# Altium PCB Switch Matrix PCB.PcbDoc (part 2 of 3)
Units mil, origin at the board's own origin, x right, y up, seen from the top; angles counter-clockwise.
Board outline 3937.01 x 7874.02 mil, 2 copper layers (Top Layer, Bottom Layer), stack 62.8 mil thick; 178 components, 222 nets, 852 pads, 317 vias.
Unrouted connection lines stored in the file: 1.
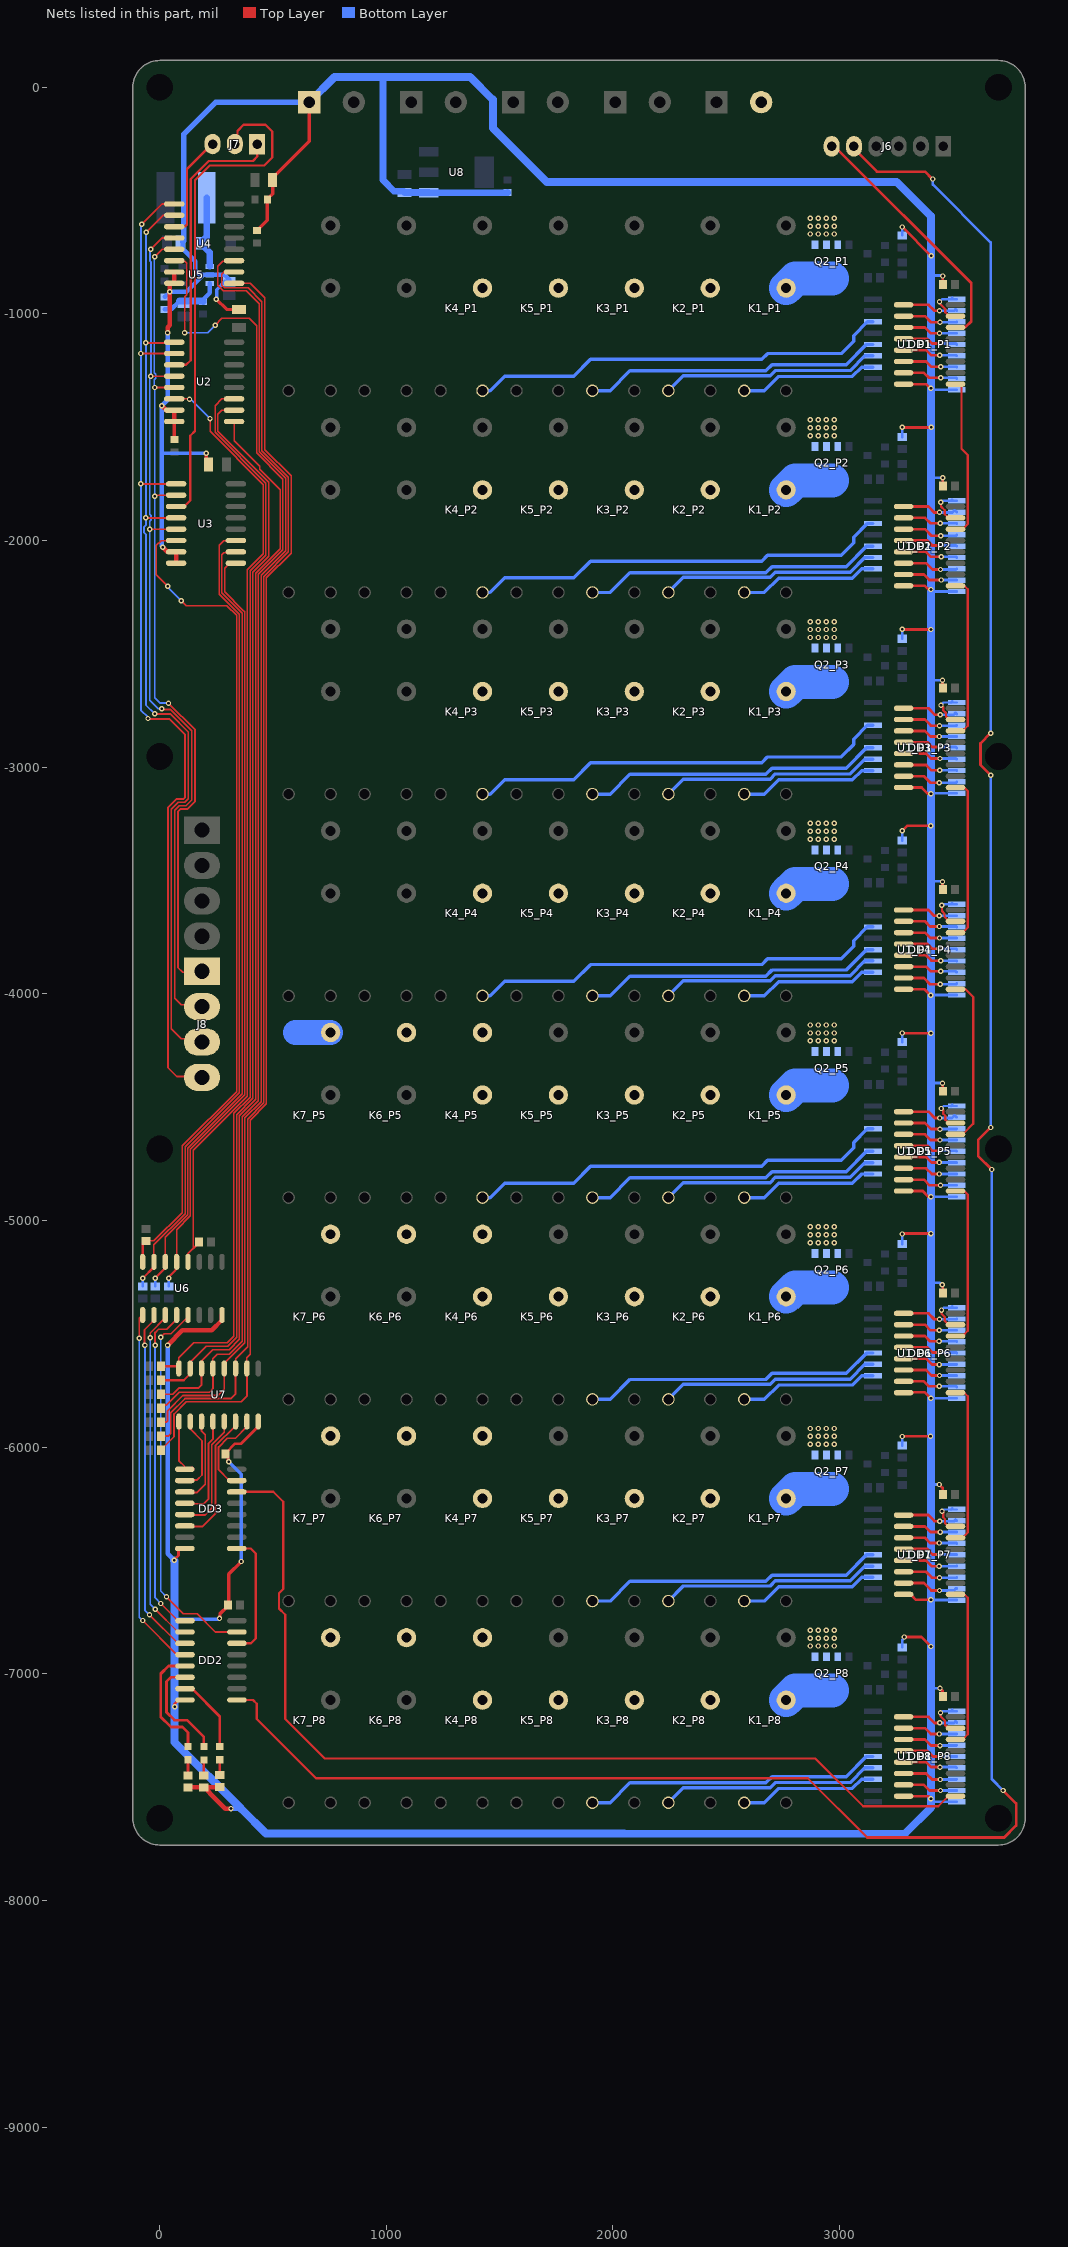
[diagram p2: the nets of this part, all layers, seen from the top]

## Via types
v1: diameter 23.62, hole 11.81, Top Layer to Bottom Layer, 315 vias
v2: diameter 31.5, hole 15.75, Top Layer to Bottom Layer, 2 vias

## Nets (pads, with @x,y where several pads share a name; then routed paths per layer and width w, separated by ;. In a path a pad name is that pad's centre, name@x,y a point inside that pad or via, vN(x,y) a via of type N, cw(c..) or ccw(c..) an arc to the next point about the centre after c; other vN are vias at no path point) (continued)
DC_PIN5: J8.1 K4_P5.3 K6_P5.3 K7_P5.3 U2.5 U3.2 U4.5 | length 3855.6
  Top Layer w8: v1(-21.81,-1805.08) -16.81,-1800.08 U3.2@72.6,-1800.08 ; v1(-21.81,-1325.08) 46.38,-1325.08 U2.5@64.49,-1325.08 ; v1(-21.12,-747.58) 11.38,-715.08 U4.5@64.49,-715.08 ; v1(38.88,-2717.58) 156.38,-2835.08 156.38,-3150.08 121.38,-3185.08 91.38,-3185.08 80.38,-3196.08 80.38,-3884.08 101.38,-3905.08 J8.1@181.38,-3905.08
  Bottom Layer w8: v1(-21.12,-747.58) -23.62,-750.08 -23.62,-1259.23 -16.81,-1266.04 -16.81,-1284.11 -23.62,-1290.92 -23.62,-1325.08 v1(-21.81,-1325.08) -21.81,-1803.27 -23.62,-1805.08 v1(-21.81,-1805.08) -21.81,-1809.31 -21.62,-1809.5 -21.62,-2693.08 2.88,-2717.58 v1(38.88,-2717.58)
  Bottom Layer w100: J8.1@186.89,-3900.91 ccw(c203.52,-3884.27) J8.1@203.52,-3907.8
  Bottom Layer w110: 600.32,-4170.91 K7_P5.3@754.41,-4170.91
DC_PIN6: J8.2 K4_P6.3 K6_P6.3 K7_P6.3 U2.4 U3.5 U4.4 | length 3948
  Top Layer w8: v1(-43.62,-1950.08) U3.5@72.6,-1950.08 ; v1(-38.62,-1275.08) U2.4@64.49,-1275.08 ; v1(-38.62,-715.08) 11.38,-665.08 U4.4@64.49,-665.08 ; v1@8.88,-2745.08 46.38,-2745.08 141.38,-2840.08 141.38,-3145.08 116.38,-3170.08 86.38,-3170.08 66.38,-3190.08 66.38,-4020.08 94.89,-4048.59 174.89,-4048.59 J8.2@186.38,-4060.08
  Bottom Layer w8: v1(-38.62,-715.08) -42.93,-719.39 -42.93,-765.77 -38.62,-770.08 v1(-38.62,-1275.08) -43.62,-1280.08 -43.62,-1884.23 -38.62,-1889.23 -38.62,-1910.92 -43.62,-1915.92 -43.62,-2669.23 -43.62,-2705.08 -6.12,-2742.58 v1(8.88,-2742.58)
DC_PIN7: J8.3 K4_P7.3 K6_P7.3 K7_P7.3 U2.1 U3.4 U4.2 | length 4263.5
  Top Layer w8: v1(-60.81,-1900.08) 71.38,-1900.08 U3.4@72.6,-1900.08 ; v1(-60.62,-1128.08) 57.49,-1128.08 59.49,-1130.08 U2.1@64.49,-1125.08 ; v1(-58.62,-640.08) 16.38,-565.08 U4.2@64.49,-565.08 ; v1(-21.12,-2765.08) 46.38,-2765.08 126.38,-2845.08 126.38,-3140.08 111.38,-3155.08 81.38,-3155.08 51.38,-3185.08 51.38,-4155.08 94.89,-4198.59 169.89,-4198.59 J8.3@186.38,-4215.08
  Bottom Layer w8: v1(-58.62,-640.08) -60.43,-641.89 -60.43,-1931.89 -68.62,-1940.08 -68.62,-1965.08 -60.43,-1973.27 -60.43,-2725.77 v1(-21.12,-2765.08)
DC_PIN8: J8.4 K4_P8.3 K6_P8.3 K7_P8.3 U2.2 U3.1 U4.1 | length 4565.8
  Top Layer w8: v1(-83.62,-1750.08) U3.1@72.6,-1750.08 ; v1(-83.62,-1175.08) 66.38,-1175.08 U2.2@64.49,-1175.08 ; v1(-78.62,-605.08) 11.38,-515.08 66.38,-515.08 U4.1@64.49,-515.08 ; v1(-51.12,-2785.08) -49.31,-2786.89 43.19,-2786.89 111.38,-2855.08 111.38,-3135.08 106.38,-3140.08 76.38,-3140.08 36.38,-3180.08 36.38,-4325.08 76.38,-4365.08 181.38,-4365.08 J8.4@186.38,-4370.08
  Bottom Layer w8: v1(-78.62,-605.08) -82.62,-609.08 -82.62,-1750.08 -82.62,-2748.58 -51.12,-2780.08 v1(-51.12,-2785.08)
DIN: DD1_P1.14 J6.6 | length 1114.6
  Top Layer w12: J6.6@2965.04,-260.91 2976.91,-260.91 3580.79,-864.79 3580.79,-1032.8 3555.73,-1057.86 3513.6,-1057.86 DD1_P1.14@3511.38,-1060.08
DOUT: DD2.9 J6.5 | length 11664.5
  Top Layer w10: DD2.9@340.87,-7115.91 412.21,-7115.91 428.88,-7132.58 428.88,-7200.21 689.75,-7461.08 2859.75,-7461.08 3121.56,-7722.89 ; J6.5@3063.46,-270.91 J6.5@3063.46,-260.91 ; v1@3408.88,-405.08 v1(3411.38,-405.08) ; 3553.57,-7722.89 3553.88,-7722.58
  Top Layer w12: J6.5@3063.46,-270.91 3165.14,-372.58 3376.38,-372.58 v1@3408.88,-405.08 ; 3121.56,-7722.89 3553.57,-7722.89 ; 3553.88,-7722.58 3726.38,-7722.58 3778.88,-7670.08 3778.88,-7572.58 v1(3721.38,-7515.08) ; v1(3666.38,-4590.08) 3611.38,-4645.08 3611.38,-4715.08 v1(3671.38,-4775.08) ; v1(3666.38,-3035.08) 3621.38,-2990.08 3621.38,-2895.08 v1(3666.38,-2850.08)
  Bottom Layer w10: v1(3666.38,-2850.08) 3666.38,-2827.58
  Bottom Layer w12: v1(3411.38,-405.08) 3411.38,-429.38 3666.38,-684.38 3666.38,-2827.58 ; v1(3666.38,-4590.08) v1(3666.38,-3035.08) ; v1(3671.38,-4775.08) 3671.38,-7465.08 v1(3721.38,-7515.08)
GND: C1_P1.1 C1_P2.1 C1_P3.1 C1_P4.1 C1_P5.1 C1_P6.1 C1_P7.1 C1_P8.1 C2.1 C3.1 C5.1 C6.1 C7.1 C8.1 C9.2 C10.1 C11.2 C12.1 C13.2 C14.1 DD1_P1.8 DD1_P2.8 DD1_P3.8 DD1_P4.8 DD1_P5.8 DD1_P6.8 DD1_P7.8 DD1_P8.8 DD2.8 DD3.8 J1.1 J5.2 Q2_P1.1 Q2_P1.2 Q2_P1.3 Q2_P2.1 Q2_P2.2 Q2_P2.3 Q2_P3.1 Q2_P3.2 Q2_P3.3 Q2_P4.1 Q2_P4.2 Q2_P4.3 Q2_P5.1 Q2_P5.2 Q2_P5.3 Q2_P6.1 Q2_P6.2 Q2_P6.3 Q2_P7.1 Q2_P7.2 Q2_P7.3 Q2_P8.1 Q2_P8.2 Q2_P8.3 R3_P1.1 R3_P2.1 R3_P3.1 R3_P4.1 R3_P5.1 R3_P6.1 R3_P7.1 R3_P8.1 R6.1 R7.1 R8.1 R9.1 U1_P1.9 U1_P2.9 U1_P3.9 U1_P4.9 U1_P5.9 U1_P6.9 U1_P7.9 U1_P8.9 U2.7 U2.8 U3.7 U3.8 U4.7 U4.8 U5.2 U6.8 U7.8 U8.1 | length 26922.6
  Top Layer w12: v1(64,-6500) 64,-6496.86 83.25,-6477.61 83.25,-6453.16 88.62,-6447.8 DD3.8@110.79,-6447.8 ; v1(66,-7146) 66,-7133.44 83.54,-7115.91 DD2.8@111.89,-7115.91 ; v1(264,-6756) v1@266.22,-6753.78 ; v1@301.52,-6058.38 305,-6061.86 v1(305,-6065) ; C3.1@301.52,-6041.8 C3.1@289.8,-6030.08 289.8,-6028.11 332.91,-5985 360,-5985 435,-5910 U7.8@435,-5887 ; C2.1@302.3,-6699.55 C2.1@302.3,-6697.58 C2.1@305,-6694.88 ; v1(3276,-1500) 3277,-1501 v1(3405,-1501) ; v1(3276,-617) 3277,-617 v1(3404,-744) ; v1(3277,-5953) 3278,-5952 v1(3401,-5952) ; v1(3277,-5060) 3279,-5058 v1(3403,-5058) ; v1(3277,-4173) 3278,-4174 v1(3403,-4174) ; v1(3277,-3280) 3299,-3258 v1(3402,-3258) ; v1(3277,-2392) 3278,-2393 v1(3403,-2393) ; DD1_P8.8@3282.4,-7540.08 3392.08,-7540.08 v1(3403,-7551) ; DD1_P7.8@3282.4,-6650.08 3313.9,-6650.08 3337.82,-6674 v1(3403,-6674) ; DD1_P6.8@3282.4,-5760.08 3284.19,-5758.29 3376.29,-5758.29 v1(3403,-5785) ; DD1_P5.8@3282.4,-4870.08 3367.08,-4870.08 3391,-4894 3401,-4894 v1(3403,-4896) ; DD1_P4.8@3282.4,-3980.08 3375.08,-3980.08 v1(3402,-4007) ; DD1_P3.8@3282.4,-3090.08 3282.48,-3090 3362,-3090 3388,-3116 3402,-3116 v1(3403,-3117) ; DD1_P2.8@3282.4,-2200.08 3376.08,-2200.08 3390,-2214 3401,-2214 v1(3403,-2216) ; DD1_P1.8@3282.4,-1310.08 3381.94,-1310.08 3399.86,-1328 v1(3403,-1328) ; v1(3286,-6838) 3361,-6838 v1(3403,-6880) ; v1(3440,-6165) 3440,-6166 3455,-6181 3455,-6209.76 C1_P7.1@3455.32,-6210.08 ; v1(3443,-7064) 3443,-7065 3455.32,-7077.32 C1_P8.1@3455.32,-7100.08 ; v1(3453,-5284) 3455.32,-5286.32 C1_P6.1@3455.32,-5320.08 ; v1(3454,-4394) 3454,-4396 3455.32,-4397.32 C1_P5.1@3455.32,-4430.08 ; v1(3454,-3505) 3454,-3538.76 C1_P4.1@3455.32,-3540.08 ; v1(3454,-2617) 3454,-2648.76 C1_P3.1@3455.32,-2650.08 ; v1(3455,-1723) 3455,-1728 3455.32,-1728.32 C1_P2.1@3455.32,-1760.08 ; v1(3455,-833) 3455,-864 3460,-869 3458.92,-870.08 C1_P1.1@3455.32,-870.08
  Top Layer w15: U2.8@64.49,-1475.08 65,-1475.59 C11.2@65,-1555 ; v1(205,-1615) 205,-1653.74 C14.1@216.26,-1665 ; v1(250,-935) 295.63,-980.63 C12.1@350,-980.63 ; v1@266.22,-6753.78 266.22,-6735.63 C2.1@302.3,-6699.55 ; v1@301.52,-6058.38 C3.1@301.52,-6041.8 ; C2.1@305,-6694.88 305,-6560 v1(360,-6505) ; C13.2@430,-632.44 431.97,-632.44 440.22,-624.19 440.22,-622.22 475.11,-587.33 C9.2@475.11,-495 475.11,-493.03 498.74,-469.4 C10.1@498.74,-410 498.74,-399.17 660.04,-237.87 J5.2@660.04,-65.91
  Top Layer w20: v1(9,-1405) 9.97,-1405 30.05,-1425.08 U2.7@64.49,-1425.08 U2.8@64.49,-1475.08 ; v1(14,-2030) 34.08,-2050.08 U3.7@72.6,-2050.08 U3.8@72.6,-2100.08 ; v1(35,-5550) 100,-5485 229.6,-5485 275,-5439.6 U6.8@275,-5417 ; v1(35,-1083.54) 35,-1059 44.41,-1049.59 v1(44.41,-902.8) 44.41,-866.75 46.09,-865.08 U4.8@64.49,-865.08 U4.7@64.49,-815.08 ; R9.1@125,-7501.57 R8.1@195,-7501.57 ; R7.1@265,-7500 264.21,-7500.79 195.79,-7500.79 R8.1@195,-7501.57 ; v1(315,-7595) 289.1,-7595 221.34,-7527.24 221.34,-7524.96 197.95,-7501.57 R8.1@195,-7501.57
  Bottom Layer w12: v1@260,-6760 v1(264,-6756) ; v1(3276,-1500) 3276.89,-1500.89 R3_P2.1@3276.89,-1543.5 ; v1(3276,-617) 3276.89,-617.89 R3_P1.1@3276.89,-653.5 ; R3_P8.1@3276.89,-6883.5 3276.89,-6850.25 3286,-6841.14 v1(3286,-6838) ; R3_P7.1@3276.89,-5993.5 3276.89,-5953.11 v1(3277,-5953) ; R3_P6.1@3276.89,-5103.5 3276.89,-5060.11 v1(3277,-5060) ; R3_P5.1@3276.89,-4213.5 3276.89,-4173.11 v1(3277,-4173) ; R3_P4.1@3276.89,-3323.5 3276.89,-3280.11 v1(3277,-3280) ; R3_P3.1@3276.89,-2433.5 3276.89,-2396.11 3277,-2396 v1(3277,-2392) ; v1(3402,-4007) 3403,-4007 3404.92,-4005.08 U1_P4.9@3516.93,-4005.08 ; v1(3403,-7551) 3406.14,-7551 3420.22,-7565.08 U1_P8.9@3516.93,-7565.08 ; 3403,-7064 v1(3443,-7064) ; v1(3403,-6674) 3404.08,-6675.08 U1_P7.9@3516.93,-6675.08 ; 3403,-6165 v1(3440,-6165) ; v1(3403,-5785) 3403.08,-5785.08 U1_P6.9@3516.93,-5785.08 ; 3403,-5275 3440.86,-5275 3449.86,-5284 v1(3453,-5284) ; v1(3403,-4896) 3403.92,-4895.08 U1_P5.9@3516.93,-4895.08 ; 3403,-4391 3406,-4394 v1(3454,-4394) ; 3403,-3503 3452,-3503 v1(3454,-3505) ; v1(3403,-3117) 3405,-3115 3513,-3115 3513.08,-3115.08 U1_P3.9@3516.93,-3115.08 ; 3403,-2613 3407,-2617 v1(3454,-2617) ; v1(3403,-2216) 3412.08,-2225.08 U1_P2.9@3516.93,-2225.08 ; 3403,-1723 v1(3455,-1723) ; v1(3403,-1328) 3410.08,-1335.08 U1_P1.9@3516.93,-1335.08 ; 3403,-831 3453,-831 v1(3455,-833)
  Bottom Layer w15: 9,-1610 14,-1615 v1(205,-1615) ; 66,-6760 v1@260,-6760 ; v1(250,-935) 251.65,-933.35 251.65,-893.35 290,-855 300.39,-855 C6.1@306.97,-848.43 ; v1(305,-6065) 360,-6120 v1(360,-6505)
  Bottom Layer w20: v1(14,-2030) 9,-2025 9,-1610 v1(9,-1405) 35,-1379 v1(35,-1083.54) ; R6.1@21.97,-925.24 23.93,-925.24 43.72,-905.46 43.72,-903.49 v1(44.41,-902.8) 118.45,-902.8 186.1,-835.14 186.1,-827.8 ; v1(35,-5550) 35,-6471 v1(64,-6500) ; C5.1@101.34,-682.8 101.34,-712.17 156.97,-767.8 156.97,-807.8 176.97,-827.8 186.1,-827.8 ; C6.1@306.97,-848.43 286.34,-827.8 186.1,-827.8 ; v1(315,-7595) 359,-7595 362,-7598
  Bottom Layer w25: C5.1@101.34,-682.8 107,-677.13 107,-207 248.09,-65.91 J5.2@660.04,-65.91
  Bottom Layer w30: 985,45 985,-410 1034.06,-459.06 1075.31,-459.06 C7.1@1080,-463.74 1080.91,-464.65 1187.09,-464.65 U8.1@1188,-465.55 1188.19,-465.74 1534.26,-465.74 C8.1@1535,-465
  Bottom Layer w35: v1(64,-6500) 66,-6502 66,-6760 v1(66,-7146) 66,-7302 359,-7595 ; 362,-7598 469.5,-7705.5 2048,-7705.5 2048.5,-7706 3288,-7706 3403,-7591 v1(3403,-7551) 3403,-7064 v1(3403,-6880) v1(3403,-6674) 3403,-6165 v1(3403,-5785) 3403,-5275 v1(3403,-5058) v1(3403,-4896) 3403,-4391 v1(3403,-4174) 3403,-4007 3403,-3503 v1(3403,-3117) 3403,-2613 v1(3403,-2393) v1(3403,-2216) 3403,-1723 v1(3403,-1328) 3403,-831 3403,-569 3252,-418 1708,-418 1470,-180 1470,-55 1370,45 985,45 770.95,45 J5.2@660.04,-65.91
  other v1: 2870.79,-6877.8 2905.79,-6877.8 2940.79,-6877.8 2975.79,-6877.8 2870.79,-6842.8 2905.79,-6842.8 2940.79,-6842.8 2975.79,-6842.8 2870.79,-6807.8 2905.79,-6807.8 2940.79,-6807.8 2975.79,-6807.8 2870.79,-5987.8 2905.79,-5987.8 2940.79,-5987.8 2975.79,-5987.8 2870.79,-5952.8 2905.79,-5952.8 2940.79,-5952.8 2975.79,-5952.8 2870.79,-5917.8 2905.79,-5917.8 2940.79,-5917.8 2975.79,-5917.8 2870.79,-5097.8 2905.79,-5097.8 2940.79,-5097.8 2975.79,-5097.8 2870.79,-5062.8 2905.79,-5062.8 2940.79,-5062.8 2975.79,-5062.8 2870.79,-5027.8 2905.79,-5027.8 2940.79,-5027.8 2975.79,-5027.8 2870.79,-4207.8 2905.79,-4207.8 2940.79,-4207.8 2975.79,-4207.8 2870.79,-4172.8 2905.79,-4172.8 2940.79,-4172.8 2975.79,-4172.8 2870.79,-4137.8 2905.79,-4137.8 2940.79,-4137.8 2975.79,-4137.8 2870.79,-3317.8 2905.79,-3317.8 2940.79,-3317.8 2975.79,-3317.8 2870.79,-3282.8 2905.79,-3282.8 2940.79,-3282.8 2975.79,-3282.8 2870.79,-3247.8 2905.79,-3247.8 2940.79,-3247.8 2975.79,-3247.8 2870.79,-2427.8 2905.79,-2427.8 2940.79,-2427.8 2975.79,-2427.8 2870.79,-2392.8 2905.79,-2392.8 2940.79,-2392.8 2975.79,-2392.8 2870.79,-2357.8 2905.79,-2357.8 2940.79,-2357.8 2975.79,-2357.8 2870.79,-1537.8 2905.79,-1537.8 2940.79,-1537.8 2975.79,-1537.8 2870.79,-1502.8 2905.79,-1502.8 2940.79,-1502.8 2975.79,-1502.8 2870.79,-1467.8 2905.79,-1467.8 2940.79,-1467.8 2975.79,-1467.8 2870.79,-647.8 2905.79,-647.8 2940.79,-647.8 2975.79,-647.8 2870.79,-612.8 2905.79,-612.8 2940.79,-612.8 2975.79,-612.8 2870.79,-577.8 2905.79,-577.8 2940.79,-577.8 2975.79,-577.8
MUXA1: R15.1 U2.11 U7.16 | length 4765.6
  Top Layer w6: U7.16@85,-5653 85,-5605 150,-5540 298,-5540 328,-5510 328,-4527.63 399.38,-4456.26 399.38,-2134.26 469.19,-2064.44 469.19,-1748.26 244.38,-1523.45 244.38,-1405.08 274.38,-1375.08 U2.11@328.27,-1375.08
  Top Layer w10: R15.1@6.57,-5643.33 75.33,-5643.33 U7.16@85,-5653
MUXA2: R11.1 U3.11 U6.15 | length 3566.9
  Top Layer w6: U6.15@-25,-5183 -25,-5106.97 112,-4969.97 112,-4675.75 351.38,-4436.37 351.38,-2325.11 262.38,-2236.11 262.38,-2021.08 283.38,-2000.08 U3.11@336.38,-2000.08
  Top Layer w10: v1(-75,-5255) -25,-5205 U6.15@-25,-5183
  Bottom Layer w10: R11.1@-75,-5291.85 v1(-75,-5255)
MUXA3: R19.1 U4.11 U7.12 | length 5698.6
  Top Layer w6: U7.12@285,-5653 285,-5630 376,-5539 376,-5525 376,-4547.52 447.38,-4476.14 447.38,-2154.14 555.98,-2045.54 555.98,-1725.28 439.38,-1608.68 439.38,-954.38 382.89,-897.89 281.21,-897.89 256.38,-873.06 256.38,-789.08 278.38,-767.08 326.27,-767.08 U4.11@328.27,-765.08
  Top Layer w8: R19.1@6.57,-5890 30,-5890 35.19,-5884.81 35.19,-5839.81 103,-5772 258.24,-5772 285,-5745.24 U7.12@285,-5653
MUXB1: R16.1 U2.10 U7.15 | length 4745.8
  Top Layer w6: U7.15@135,-5664.79 U7.15@135,-5653 135,-5625 205,-5555 300,-5555 340,-5515 340,-4532.6 411.38,-4461.23 411.38,-2139.23 481.19,-2069.42 481.19,-1743.29 256.38,-1518.48 256.38,-1442.08 273.38,-1425.08 U2.10@328.27,-1425.08
  Top Layer w10: R16.1@6.57,-5705 106.58,-5705 135,-5676.58 U7.15@135,-5664.79
MUXB2: R12.1 U3.10 U6.14 | length 3492.4
  Top Layer w6: U6.14@25,-5196.5 U6.14@25,-5183 25,-5073.94 124,-4974.94 124,-4680.72 363.38,-4441.34 363.38,-2320.14 355.38,-2312.14 355.38,-2312.08 274.38,-2231.08 274.38,-2062.08 283.01,-2053.45 333.01,-2053.45 U3.10@336.38,-2050.08
  Top Layer w10: v1(-20,-5255) 25,-5210 U6.14@25,-5196.5
  Bottom Layer w10: R12.1@-20,-5291.85 v1(-20,-5255)
MUXB3: R20.1 U4.10 U7.11 | length 5736.7
  Top Layer w6: U4.10@328.27,-815.08 284.92,-815.08 273.99,-826.01 273.99,-873.7 286.18,-885.89 390.89,-885.89 451.38,-946.38 451.38,-1603.71 567.98,-1720.31 567.98,-2050.51 459.38,-2159.11 459.38,-4481.11 388,-4552.49 388,-5557 335,-5610 U7.11@335,-5653
  Top Layer w8: R20.1@6.57,-5951.67 37.52,-5951.67 49.19,-5940 49.19,-5848.58 111.77,-5786 314,-5786 335,-5765 U7.11@335,-5653
MUXC1: R17.1 U2.9 U7.14 | length 4715.9
  Top Layer w6: U7.14@185,-5653 185,-5620 235,-5570 307,-5570 352,-5525 352,-4537.58 423.38,-4466.2 423.38,-2144.2 531.98,-2035.59 531.98,-1777.11 440.57,-1685.7 440.57,-1673.27 328.27,-1560.97 U2.9@328.27,-1475.08
  Top Layer w8: R17.1@6.57,-5766.67 58.53,-5766.67 85.2,-5740 170,-5740 185,-5725 U7.14@185,-5653
MUXC2: R13.1 U3.9 U6.13 | length 3405.1
  Top Layer w6: U6.13@75,-5183 75,-5040.91 136,-4979.91 136,-4685.69 375.38,-4446.31 375.38,-2315.17 367.38,-2307.17 367.38,-2307.08 286.38,-2226.08 286.38,-2121.38 307.68,-2100.08 U3.9@336.38,-2100.08
  Top Layer w10: v1(40,-5255) 40,-5250 70,-5220 70,-5215.27 75,-5210.27 U6.13@75,-5183
  Bottom Layer w10: R13.1@40,-5291.85 v1(40,-5255)
MUXC3: R21.1 U4.9 U7.10 | length 5677.6
  Top Layer w6: U4.9@328.27,-865.08 400.08,-865.08 464.38,-929.38 464.38,-1599.74 579.98,-1715.34 579.98,-2055.48 471.38,-2164.08 471.38,-4486.08 400,-4557.46 400,-5590 385,-5605 U7.10@385,-5653
  Top Layer w8: R21.1@6.57,-6013.33 12.48,-6013.33 12.48,-6004.47 63.19,-5953.77 63.19,-5854.38 117.57,-5800 360,-5800 385,-5775 U7.10@385,-5653
MUXEN1: R14.1 U2.6 U6.12 | length 4188.6
  Top Layer w6: U2.6@64.49,-1375.08 129.38,-1375.08 v1(131.38,-1377.08) ; 125,-5146.38 148,-5123.38 148,-4690.66 387.38,-4451.28 387.38,-2129.28 457.19,-2059.47 457.19,-1753.23 222.38,-1518.42 v1(222.38,-1462.08)
  Top Layer w10: U6.12@125,-5183 125,-5146.38 ; 148,-5123.38 173.43,-5097.95 R14.1@173.43,-5095
  Bottom Layer w6: v1(131.38,-1377.08) 137.38,-1377.08 v1(222.38,-1462.08)
MUXEN2: R10.1 U3.6 U6.16 | length 3703.1
  Top Layer w6: R10.1@-62.28,-5090 R10.1@-60,-5090 -25,-5090 100,-4965 100,-4670.78 339.38,-4431.4 339.38,-2330.08 296.38,-2287.08 116.38,-2287.08 v1(95,-2265.7) ; v1(36.38,-2202.08) -14.62,-2151.08 -14.62,-2021.62 6.92,-2000.08 U3.6@72.6,-2000.08
  Top Layer w10: U6.16@-75,-5183 -75,-5102.72 R10.1@-62.28,-5090
  Bottom Layer w6: v1(36.38,-2202.08) 36.38,-2207.08 v1(95,-2265.7)
MUXEN3: R18.1 U4.6 U7.13 | length 5889.1
  Top Layer w6: U4.6@64.49,-765.08 67.86,-768.45 110.75,-768.45 119.38,-777.08 119.38,-915.19 110,-924.57 v1(110,-1083.54) ; U7.13@235,-5653 235,-5610 255,-5590 308.03,-5590 364,-5534.03 364,-4542.55 435.38,-4471.17 435.38,-2149.17 543.98,-2040.56 543.98,-1730.25 427.38,-1613.65 427.38,-1052.38 395,-1020 275,-1020 v1(245,-1050)
  Top Layer w8: R18.1@6.57,-5828.33 19.91,-5815 30,-5815 87,-5758 220,-5758 235,-5743 U7.13@235,-5653
  Bottom Layer w6: v1(110,-1083.54) 211.46,-1083.54 v1(245,-1050)
MUXOUT1: J7.1 U2.3 | length 1270.3
  Top Layer w10: U2.3@64.49,-1225.08 116.38,-1225.08 136.76,-1204.69 136.76,-404.69 216.38,-325.08 411.38,-325.08 430.32,-306.14 J7.1@430.32,-250.91
MUXOUT2: J7.2 U3.3 | length 2231.9
  Top Layer w10: U3.3@72.6,-1850.08 108.8,-1850.08 135,-1823.87 135,-1537.99 156.38,-1516.61 156.38,-410.08 221.38,-345.08 461.38,-345.08 496.38,-310.08 496.38,-195.08 466.38,-165.08 371.38,-165.08 343.37,-193.09 343.37,-239.43 J7.2@331.89,-250.91
MUXOUT3: J7.3 U4.3 | length 463.3
  Top Layer w10: U4.3@64.49,-615.08 111.38,-615.08 120.76,-605.69 120.76,-360.69 230.55,-250.91 J7.3@233.46,-250.91
NetC4_1: C4.1 R4.1 R6.2 U5.3 | length 278.1
  Bottom Layer w20: R6.2@21.97,-980.36 50.64,-980.36 C4.1@87.57,-943.43 ; R4.1@191.97,-945.24 191.97,-936.85 221.02,-907.8 U5.3@221.02,-865.2
  Bottom Layer w30: C4.1@87.57,-943.43 190.15,-943.43 R4.1@191.97,-945.24
NetD1_2: D1.2 L1.2 U5.1 | length 331
  Bottom Layer w30: L1.2@207.52,-487.8 207.52,-660.31 D1.2@180.04,-687.8 221.02,-728.78 U5.1@221.02,-790.39
NetD2_1: D2.1 DD2.7 | length 336.4
  Top Layer w12: DD2.7@111.89,-7065.91 143.39,-7065.91 265,-7187.52 D2.1@265,-7320.47
NetD2_2: D2.2 R7.2 | length 67.3
  Top Layer w12: R7.2@265,-7446.85 D2.2@265,-7379.53
NetD3_1: D3.1 DD2.6 | length 476.3
  Top Layer w12: DD2.6@111.89,-7015.91 49.09,-7015.91 30,-7035 30,-7170 65,-7205 120,-7205 195,-7280 D3.1@195,-7320.94
NetD3_2: D3.2 R8.2 | length 68.4
  Top Layer w12: R8.2@195,-7448.43 D3.2@195,-7380
NetD4_1: D4.1 DD2.5 | length 520.5
  Top Layer w12: DD2.5@111.89,-6965.91 39.09,-6965.91 5,-7000 5,-7190 50,-7235 100,-7235 125,-7260 D4.1@125,-7320.47
NetD4_2: D4.2 R9.2 | length 68.9
  Top Layer w12: R9.2@125,-7448.43 D4.2@125,-7379.53
NetDD1_P1_1: DD1_P1.1 U1_P1.2 | length 249.9
  Top Layer w12: DD1_P1.1@3282.4,-960.08 3391.89,-960.08 3417.81,-986 v1(3441,-986)
  Bottom Layer w12: v1(3441,-986) 3505.85,-986 3511.85,-980 U1_P1.2@3516.93,-985.08
NetDD1_P1_2: DD1_P1.2 U1_P1.3 | length 246.5
  Top Layer w12: DD1_P1.2@3282.4,-1010.08 3376.89,-1010.08 3403.81,-1037 v1(3443,-1037)
  Bottom Layer w12: v1(3443,-1037) 3515.01,-1037 U1_P1.3@3516.93,-1035.08
NetDD1_P1_3: DD1_P1.3 U1_P1.4 | length 245.6
  Top Layer w12: DD1_P1.3@3282.4,-1060.08 3376.89,-1060.08 3402.81,-1086 v1(3441,-1086)
  Bottom Layer w12: v1(3441,-1086) 3516.01,-1086 U1_P1.4@3516.93,-1085.08
NetDD1_P1_4: DD1_P1.4 U1_P1.5 | length 244.9
  Top Layer w12: DD1_P1.4@3282.4,-1110.08 3386.89,-1110.08 3407.81,-1131 v1(3445,-1131)
  Bottom Layer w12: v1(3445,-1131) 3512.85,-1131 U1_P1.5@3516.93,-1135.08
NetDD1_P1_5: DD1_P1.5 U1_P1.6 | length 244.9
  Top Layer w12: DD1_P1.5@3282.4,-1160.08 3381.89,-1160.08 3404.81,-1183 v1(3442,-1183)
  Bottom Layer w12: v1(3442,-1183) 3514.85,-1183 U1_P1.6@3516.93,-1185.08
NetDD1_P1_6: DD1_P1.6 U1_P1.7 | length 244.9
  Top Layer w12: DD1_P1.6@3282.4,-1210.08 3381.89,-1210.08 3405.81,-1234 v1(3446,-1234)
  Bottom Layer w12: v1(3446,-1234) 3515.85,-1234 U1_P1.7@3516.93,-1235.08
NetDD1_P1_7: DD1_P1.7 U1_P1.8 | length 244.9
  Top Layer w12: DD1_P1.7@3282.4,-1260.08 3371.89,-1260.08 3393.81,-1282 v1(3446,-1282)
  Bottom Layer w12: v1(3446,-1282) 3513.85,-1282 U1_P1.8@3516.93,-1285.08
NetDD1_P1_9: DD1_P1.9 DD1_P2.14 | length 715.3
  Top Layer w10: DD1_P2.14@3511.38,-1950.08 3542.87,-1950.08 3565.69,-1927.27 3565.69,-1623.05 3537.87,-1595.24 3537.87,-1316.37 3536.58,-1315.08 3536.38,-1315.08 3531.38,-1310.08 DD1_P1.9@3511.38,-1310.08
NetDD1_P1_15: DD1_P1.15 U1_P1.1 | length 197.3
  Top Layer w10: v1(3441,-946) 3441,-953.46 3466.13,-978.58 3466.13,-993.13 3483.07,-1010.08 DD1_P1.15@3511.38,-1010.08
  Bottom Layer w10: v1(3441,-946) 3451.92,-935.08 3491.93,-935.08 U1_P1.1@3516.93,-935.08
  Bottom Layer w12: U1_P1.1@3491.93,-935.08 U1_P1.1@3496.93,-930.08
NetDD1_P2_1: DD1_P2.1 U1_P2.2 | length 253.2
  Top Layer w12: DD1_P2.1@3282.4,-1850.08 3391.89,-1850.08 3417.81,-1876 v1(3441,-1876)
  Bottom Layer w12: v1(3441,-1876) 3497.85,-1876 3507.85,-1866 U1_P2.2@3516.93,-1875.08
NetDD1_P2_2: DD1_P2.2 U1_P2.3 | length 244.9
  Top Layer w12: DD1_P2.2@3282.4,-1900.08 3376.89,-1900.08 3400.81,-1924 v1(3444,-1924)
  Bottom Layer w12: v1(3444,-1924) 3515.85,-1924 U1_P2.3@3516.93,-1925.08
NetDD1_P2_3: DD1_P2.3 U1_P2.4 | length 248.1
  Top Layer w12: DD1_P2.3@3282.4,-1950.08 3376.89,-1950.08 3405.81,-1979 v1(3446,-1979)
  Bottom Layer w12: v1(3446,-1979) 3513.01,-1979 U1_P2.4@3516.93,-1975.08
NetDD1_P2_4: DD1_P2.4 U1_P2.5 | length 244.9
  Top Layer w12: DD1_P2.4@3282.4,-2000.08 3386.89,-2000.08 3408.81,-2022 v1(3446,-2022)
  Bottom Layer w12: v1(3446,-2022) 3513.85,-2022 U1_P2.5@3516.93,-2025.08
NetDD1_P2_5: DD1_P2.5 U1_P2.6 | length 244.9
  Top Layer w12: DD1_P2.5@3282.4,-2050.08 3381.89,-2050.08 3403.81,-2072 v1(3448,-2072)
  Bottom Layer w12: v1(3448,-2072) 3513.85,-2072 U1_P2.6@3516.93,-2075.08
NetDD1_P2_6: DD1_P2.6 U1_P2.7 | length 247.3
  Top Layer w12: DD1_P2.6@3282.4,-2100.08 3381.89,-2100.08 3409.81,-2128 v1(3445,-2128)
  Bottom Layer w12: v1(3445,-2128) 3514.01,-2128 U1_P2.7@3516.93,-2125.08
NetDD1_P2_7: DD1_P2.7 U1_P2.8 | length 244.9
  Top Layer w12: DD1_P2.7@3282.4,-2150.08 3371.89,-2150.08 3395.81,-2174 v1(3448,-2174)
  Bottom Layer w12: v1(3448,-2174) 3515.85,-2174 U1_P2.8@3516.93,-2175.08
NetDD1_P2_9: DD1_P2.9 DD1_P3.14 | length 726.4
  Top Layer w10: DD1_P3.14@3511.38,-2840.08 3542.87,-2840.08 3565.69,-2817.27 3565.69,-2215.24 3550.52,-2200.08 DD1_P2.9@3511.38,-2200.08
NetDD1_P2_15: DD1_P2.15 U1_P2.1 | length 193.6
  Top Layer w10: v1(3447,-1831) 3447,-1849.46 3464.53,-1866.99 3464.53,-1884.73 3479.88,-1900.08 DD1_P2.15@3511.38,-1900.08
  Bottom Layer w10: v1(3447,-1831) 3452.92,-1825.08 3491.93,-1825.08 U1_P2.1@3516.93,-1825.08
  Bottom Layer w12: U1_P2.1@3491.93,-1825.08 U1_P2.1@3496.93,-1820.08
NetDD1_P3_1: DD1_P3.1 U1_P3.2 | length 252.3
  Top Layer w12: DD1_P3.1@3282.4,-2740.08 3391.89,-2740.08 3420.81,-2769 v1(3444,-2769)
  Bottom Layer w12: v1(3444,-2769) 3502.85,-2769 3511.85,-2760 U1_P3.2@3516.93,-2765.08
NetDD1_P3_2: DD1_P3.2 U1_P3.3 | length 246.5
  Top Layer w12: DD1_P3.2@3282.4,-2790.08 3376.89,-2790.08 3403.81,-2817 v1(3441,-2817)
  Bottom Layer w12: v1(3441,-2817) 3515.01,-2817 U1_P3.3@3516.93,-2815.08
NetDD1_P3_3: DD1_P3.3 U1_P3.4 | length 244.9
  Top Layer w12: DD1_P3.3@3282.4,-2840.08 3376.89,-2840.08 3401.81,-2865 v1(3440,-2865)
  Bottom Layer w12: v1(3440,-2865) 3516.85,-2865 U1_P3.4@3516.93,-2865.08
NetDD1_P3_4: DD1_P3.4 U1_P3.5 | length 244.9
  Top Layer w12: DD1_P3.4@3282.4,-2890.08 3386.89,-2890.08 3407.81,-2911 v1(3441,-2911)
  Bottom Layer w12: v1(3441,-2911) 3512.85,-2911 U1_P3.5@3516.93,-2915.08
NetDD1_P3_5: DD1_P3.5 U1_P3.6 | length 244.9
  Top Layer w12: DD1_P3.5@3282.4,-2940.08 3381.89,-2940.08 3403.81,-2962 v1(3443,-2962)
  Bottom Layer w12: v1(3443,-2962) 3513.85,-2962 U1_P3.6@3516.93,-2965.08
NetDD1_P3_6: DD1_P3.6 U1_P3.7 | length 244.9
  Top Layer w12: DD1_P3.6@3282.4,-2990.08 3381.89,-2990.08 3405.81,-3014 v1(3442,-3014)
  Bottom Layer w12: v1(3442,-3014) 3515.85,-3014 U1_P3.7@3516.93,-3015.08
NetDD1_P3_7: DD1_P3.7 U1_P3.8 | length 248.1
  Top Layer w12: DD1_P3.7@3282.4,-3040.08 3371.89,-3040.08 3400.81,-3069 v1(3440,-3069)
  Bottom Layer w12: v1(3440,-3069) 3513.01,-3069 U1_P3.8@3516.93,-3065.08
NetDD1_P3_9: DD1_P3.9 DD1_P4.14 | length 726.4
  Top Layer w10: DD1_P4.14@3511.38,-3730.08 3542.87,-3730.08 3565.69,-3707.27 3565.69,-3105.24 3550.52,-3090.08 DD1_P3.9@3511.38,-3090.08
NetDD1_P3_15: DD1_P3.15 U1_P3.1 | length 187.9
  Top Layer w10: v1(3447.46,-2726.54) 3457.07,-2736.15 3457.07,-2749.53 3469.13,-2761.58 3469.13,-2776.13 3483.07,-2790.08 DD1_P3.15@3511.38,-2790.08
  Bottom Layer w10: v1(3447.46,-2726.54) 3458.92,-2715.08 3491.93,-2715.08 U1_P3.1@3516.93,-2715.08
  Bottom Layer w12: U1_P3.1@3491.93,-2715.08 U1_P3.1@3496.93,-2710.08
NetDD1_P4_1: DD1_P4.1 U1_P4.2 | length 245.6
  Top Layer w12: DD1_P4.1@3282.4,-3630.08 3391.89,-3630.08 3417.81,-3656 v1(3440,-3656)
  Bottom Layer w12: v1(3440,-3656) 3516.01,-3656 U1_P4.2@3516.93,-3655.08
NetDD1_P4_2: DD1_P4.2 U1_P4.3 | length 244.9
  Top Layer w12: DD1_P4.2@3282.4,-3680.08 3376.89,-3680.08 3399.81,-3703 v1(3440,-3703)
  Bottom Layer w12: v1(3440,-3703) 3514.85,-3703 U1_P4.3@3516.93,-3705.08
NetDD1_P4_3: DD1_P4.3 U1_P4.4 | length 244.9
  Top Layer w12: DD1_P4.3@3282.4,-3730.08 3376.89,-3730.08 3400.81,-3754 v1(3441,-3754)
  Bottom Layer w12: v1(3441,-3754) 3515.85,-3754 U1_P4.4@3516.93,-3755.08
NetDD1_P4_4: DD1_P4.4 U1_P4.5 | length 244.9
  Top Layer w12: DD1_P4.4@3282.4,-3780.08 3386.89,-3780.08 3407.81,-3801 v1(3440,-3801)
  Bottom Layer w12: v1(3440,-3801) 3512.85,-3801 U1_P4.5@3516.93,-3805.08
NetDD1_P4_5: DD1_P4.5 U1_P4.6 | length 244.9
  Top Layer w12: DD1_P4.5@3282.4,-3830.08 3381.89,-3830.08 3405.81,-3854 v1(3446,-3854)
  Bottom Layer w12: v1(3446,-3854) 3515.85,-3854 U1_P4.6@3516.93,-3855.08
NetDD1_P4_6: DD1_P4.6 U1_P4.7 | length 244.9
  Top Layer w12: DD1_P4.6@3282.4,-3880.08 3381.89,-3880.08 3401.81,-3900 v1(3447,-3900)
  Bottom Layer w12: v1(3447,-3900) 3511.85,-3900 U1_P4.7@3516.93,-3905.08
NetDD1_P4_7: DD1_P4.7 U1_P4.8 | length 247.3
  Top Layer w12: DD1_P4.7@3282.4,-3930.08 3371.89,-3930.08 3399.81,-3958 v1(3444,-3958)
  Bottom Layer w12: v1(3444,-3958) 3514.01,-3958 U1_P4.8@3516.93,-3955.08
NetDD1_P4_9: DD1_P4.9 DD1_P5.14 | length 749.5
  Top Layer w10: DD1_P5.14@3511.38,-4620.08 3542.87,-4620.08 3590.12,-4572.84 3590.12,-4014.68 3555.52,-3980.08 DD1_P4.9@3511.38,-3980.08
NetDD1_P4_15: DD1_P4.15 U1_P4.1 | length 186.3
  Top Layer w10: v1(3451.46,-3609.54) 3451.46,-3635.2 3462.81,-3646.55 3462.81,-3659.82 3483.07,-3680.08 DD1_P4.15@3511.38,-3680.08
  Bottom Layer w10: v1(3451.46,-3609.54) 3455.92,-3605.08 3491.93,-3605.08 U1_P4.1@3516.93,-3605.08
  Bottom Layer w12: U1_P4.1@3491.93,-3605.08 U1_P4.1@3496.93,-3600.08
NetDD1_P5_1: DD1_P5.1 U1_P5.2 | length 254.8
  Top Layer w12: DD1_P5.1@3282.4,-4520.08 3391.89,-4520.08 3419.81,-4548 v1(3442,-4548)
  Bottom Layer w12: v1(3442,-4548) 3495.85,-4548 3507.85,-4536 U1_P5.2@3516.93,-4545.08
NetDD1_P5_2: DD1_P5.2 U1_P5.3 | length 246.5
  Top Layer w12: DD1_P5.2@3282.4,-4570.08 3376.89,-4570.08 3403.81,-4597 v1(3443,-4597)
  Bottom Layer w12: v1(3443,-4597) 3515.01,-4597 U1_P5.3@3516.93,-4595.08
NetDD1_P5_3: DD1_P5.3 U1_P5.4 | length 244.9
  Top Layer w12: DD1_P5.3@3282.4,-4620.08 3376.89,-4620.08 3401.81,-4645 v1(3443,-4645)
  Bottom Layer w12: v1(3443,-4645) 3516.85,-4645 U1_P5.4@3516.93,-4645.08
NetDD1_P5_4: DD1_P5.4 U1_P5.5 | length 244.9
  Top Layer w12: DD1_P5.4@3282.4,-4670.08 3386.89,-4670.08 3409.81,-4693 v1(3441,-4693)
  Bottom Layer w12: v1(3441,-4693) 3514.85,-4693 U1_P5.5@3516.93,-4695.08
NetDD1_P5_5: DD1_P5.5 U1_P5.6 | length 244.9
  Top Layer w12: DD1_P5.5@3282.4,-4720.08 3381.89,-4720.08 3405.81,-4744 v1(3440,-4744)
  Bottom Layer w12: v1(3440,-4744) 3515.85,-4744 U1_P5.6@3516.93,-4745.08
NetDD1_P5_6: DD1_P5.6 U1_P5.7 | length 244.9
  Top Layer w12: DD1_P5.6@3282.4,-4770.08 3381.89,-4770.08 3406.81,-4795 v1(3440,-4795)
  Bottom Layer w12: v1(3440,-4795) 3516.85,-4795 U1_P5.7@3516.93,-4795.08
NetDD1_P5_7: DD1_P5.7 U1_P5.8 | length 244.9
  Top Layer w12: DD1_P5.7@3282.4,-4820.08 3371.89,-4820.08 3396.81,-4845 v1(3445,-4845)
  Bottom Layer w12: v1(3445,-4845) 3516.85,-4845 U1_P5.8@3516.93,-4845.08
NetDD1_P5_9: DD1_P5.9 DD1_P6.14 | length 726.4
  Top Layer w10: DD1_P6.14@3511.38,-5510.08 3542.87,-5510.08 3565.69,-5487.27 3565.69,-4885.24 3550.52,-4870.08 DD1_P5.9@3511.38,-4870.08
NetDD1_P5_15: DD1_P5.15 U1_P5.1 | length 187.9
  Top Layer w10: v1(3449,-4506) 3457.07,-4514.07 3457.07,-4529.53 3466.03,-4538.49 3466.03,-4556.23 3479.88,-4570.08 DD1_P5.15@3511.38,-4570.08
  Bottom Layer w10: v1(3449,-4506) 3459.92,-4495.08 3491.93,-4495.08 U1_P5.1@3516.93,-4495.08
  Bottom Layer w12: U1_P5.1@3491.93,-4495.08 U1_P5.1@3496.93,-4490.08
NetDD1_P6_1: DD1_P6.1 U1_P6.2 | length 245.6
  Top Layer w12: DD1_P6.1@3282.4,-5410.08 3391.89,-5410.08 3417.81,-5436 v1(3441,-5436)
  Bottom Layer w12: v1(3441,-5436) 3516.01,-5436 U1_P6.2@3516.93,-5435.08
NetDD1_P6_2: DD1_P6.2 U1_P6.3 | length 244.9
  Top Layer w12: DD1_P6.2@3282.4,-5460.08 3376.89,-5460.08 3401.81,-5485 v1(3440,-5485)
  Bottom Layer w12: v1(3440,-5485) 3516.85,-5485 U1_P6.3@3516.93,-5485.08
NetDD1_P6_3: DD1_P6.3 U1_P6.4 | length 244.9
  Top Layer w12: DD1_P6.3@3282.4,-5510.08 3376.89,-5510.08 3399.81,-5533 v1(3439,-5533)
  Bottom Layer w12: v1(3439,-5533) 3514.85,-5533 U1_P6.4@3516.93,-5535.08
NetDD1_P6_4: DD1_P6.4 U1_P6.5 | length 244.9
  Top Layer w12: DD1_P6.4@3282.4,-5560.08 3386.89,-5560.08 3409.81,-5583 v1(3439,-5583)
  Bottom Layer w12: v1(3439,-5583) 3514.85,-5583 U1_P6.5@3516.93,-5585.08
NetDD1_P6_5: DD1_P6.5 U1_P6.6 | length 245.6
  Top Layer w12: DD1_P6.5@3282.4,-5610.08 3381.89,-5610.08 3407.81,-5636 v1(3440,-5636)
  Bottom Layer w12: v1(3440,-5636) 3516.01,-5636 U1_P6.6@3516.93,-5635.08
NetDD1_P6_6: DD1_P6.6 U1_P6.7 | length 244.9
  Top Layer w12: DD1_P6.6@3282.4,-5660.08 3381.89,-5660.08 3405.81,-5684 v1(3441,-5684)
  Bottom Layer w12: v1(3441,-5684) 3515.85,-5684 U1_P6.7@3516.93,-5685.08
NetDD1_P6_7: DD1_P6.7 U1_P6.8 | length 244.9
  Top Layer w12: DD1_P6.7@3282.4,-5710.08 3371.89,-5710.08 3393.81,-5732 v1(3440,-5732)
  Bottom Layer w12: v1(3440,-5732) 3513.85,-5732 U1_P6.8@3516.93,-5735.08
NetDD1_P6_9: DD1_P6.9 DD1_P7.14 | length 726.4
  Top Layer w10: DD1_P7.14@3511.38,-6400.08 3542.87,-6400.08 3565.69,-6377.27 3565.69,-5775.24 3550.52,-5760.08 DD1_P6.9@3511.38,-5760.08
NetDD1_P6_15: DD1_P6.15 U1_P6.1 | length 187.5
  Top Layer w10: v1(3449.46,-5395.54) 3449.46,-5412.2 3463.81,-5426.55 3463.81,-5444.01 3479.88,-5460.08 DD1_P6.15@3511.38,-5460.08
  Bottom Layer w10: v1(3449.46,-5395.54) 3459.92,-5385.08 3491.93,-5385.08 U1_P6.1@3516.93,-5385.08
  Bottom Layer w12: U1_P6.1@3491.93,-5385.08 U1_P6.1@3496.93,-5380.08
NetDD1_P7_1: DD1_P7.1 U1_P7.2 | length 250.7
  Top Layer w12: DD1_P7.1@3282.4,-6300.08 3391.89,-6300.08 3418.81,-6327 v1(3442,-6327)
  Bottom Layer w12: v1(3442,-6327) 3504.85,-6327 3511.85,-6320 U1_P7.2@3516.93,-6325.08
NetDD1_P7_2: DD1_P7.2 U1_P7.3 | length 244.9
  Top Layer w12: DD1_P7.2@3282.4,-6350.08 3376.89,-6350.08 3401.81,-6375 v1(3444,-6375)
  Bottom Layer w12: v1(3444,-6375) 3516.85,-6375 U1_P7.3@3516.93,-6375.08
NetDD1_P7_3: DD1_P7.3 U1_P7.4 | length 244.9
  Top Layer w12: DD1_P7.3@3282.4,-6400.08 3376.89,-6400.08 3399.81,-6423 v1(3440,-6423)
  Bottom Layer w12: v1(3440,-6423) 3514.85,-6423 U1_P7.4@3516.93,-6425.08
NetDD1_P7_4: DD1_P7.4 U1_P7.5 | length 244.9
  Top Layer w12: DD1_P7.4@3282.4,-6450.08 3386.89,-6450.08 3410.81,-6474 v1(3439,-6474)
  Bottom Layer w12: v1(3439,-6474) 3515.85,-6474 U1_P7.5@3516.93,-6475.08
NetDD1_P7_5: DD1_P7.5 U1_P7.6 | length 245.6
  Top Layer w12: DD1_P7.5@3282.4,-6500.08 3381.89,-6500.08 3407.81,-6526 v1(3439,-6526)
  Bottom Layer w12: v1(3439,-6526) 3516.01,-6526 U1_P7.6@3516.93,-6525.08
NetDD1_P7_6: DD1_P7.6 U1_P7.7 | length 245.6
  Top Layer w12: DD1_P7.6@3282.4,-6550.08 3381.89,-6550.08 3407.81,-6576 v1(3441,-6576)
  Bottom Layer w12: v1(3441,-6576) 3516.01,-6576 U1_P7.7@3516.93,-6575.08
NetDD1_P7_7: DD1_P7.7 U1_P7.8 | length 253.2
  Top Layer w12: DD1_P7.7@3282.4,-6600.08 3371.89,-6600.08 3404.81,-6633 v1(3441,-6633)
  Bottom Layer w12: v1(3441,-6633) 3504.85,-6633 3514.85,-6623 U1_P7.8@3516.93,-6625.08
NetDD1_P7_9: DD1_P7.9 DD1_P8.14 | length 730.5
  Top Layer w10: DD1_P8.14@3511.38,-7290.08 3542.87,-7290.08 3565.69,-7267.27 3565.69,-6665.24 3550.52,-6650.08 3526.38,-6650.08 3521.38,-6655.08 3516.38,-6650.08 DD1_P7.9@3511.38,-6650.08
NetDD1_P7_15: DD1_P7.15 U1_P7.1 | length 185.4
  Top Layer w10: v1(3452,-6283) 3457.07,-6288.07 3457.07,-6309.53 3465.53,-6317.99 3465.53,-6335.73 3479.88,-6350.08 DD1_P7.15@3511.38,-6350.08
  Bottom Layer w10: v1(3452,-6283) 3459.92,-6275.08 3491.93,-6275.08 U1_P7.1@3516.93,-6275.08
  Bottom Layer w12: U1_P7.1@3491.93,-6275.08 U1_P7.1@3496.93,-6270.08
NetDD1_P8_1: DD1_P8.1 U1_P8.2 | length 250.7
  Top Layer w12: DD1_P8.1@3282.4,-7190.08 3391.89,-7190.08 3418.81,-7217 v1(3442,-7217)
  Bottom Layer w12: v1(3442,-7217) 3504.85,-7217 3511.85,-7210 U1_P8.2@3516.93,-7215.08
NetDD1_P8_2: DD1_P8.2 U1_P8.3 | length 245.6
  Top Layer w12: DD1_P8.2@3282.4,-7240.08 3376.89,-7240.08 3402.81,-7266 v1(3440,-7266)
  Bottom Layer w12: v1(3440,-7266) 3516.01,-7266 U1_P8.3@3516.93,-7265.08
NetDD1_P8_3: DD1_P8.3 U1_P8.4 | length 246.5
  Top Layer w12: DD1_P8.3@3282.4,-7290.08 3376.89,-7290.08 3403.81,-7317 v1(3443,-7317)
  Bottom Layer w12: v1(3443,-7317) 3515.01,-7317 U1_P8.4@3516.93,-7315.08
NetDD1_P8_4: DD1_P8.4 U1_P8.5 | length 244.9
  Top Layer w12: DD1_P8.4@3282.4,-7340.08 3386.89,-7340.08 3411.81,-7365 v1(3444,-7365)
  Bottom Layer w12: v1(3444,-7365) 3516.85,-7365 U1_P8.5@3516.93,-7365.08
NetDD1_P8_5: DD1_P8.5 U1_P8.6 | length 244.9
  Top Layer w12: DD1_P8.5@3282.4,-7390.08 3381.89,-7390.08 3403.81,-7412 v1(3443,-7412)
  Bottom Layer w12: v1(3443,-7412) 3513.85,-7412 U1_P8.6@3516.93,-7415.08
NetDD1_P8_6: DD1_P8.6 U1_P8.7 | length 246.5
  Top Layer w12: DD1_P8.6@3282.4,-7440.08 3381.89,-7440.08 3408.81,-7467 v1(3444,-7467)
  Bottom Layer w12: v1(3444,-7467) 3515.01,-7467 U1_P8.7@3516.93,-7465.08
NetDD1_P8_7: DD1_P8.7 U1_P8.8 | length 244.9
  Top Layer w12: DD1_P8.7@3282.4,-7490.08 3371.89,-7490.08 3396.81,-7515 v1(3445,-7515)
  Bottom Layer w12: v1(3445,-7515) 3516.85,-7515 U1_P8.8@3516.93,-7515.08
NetDD1_P8_9: DD1_P8.9 DD3.14 | length 4339.3
  Top Layer w10: DD3.14@339.76,-6197.8 339.98,-6197.58 501.38,-6197.58 544.88,-6241.08 544.88,-6626.58 526.38,-6645.08 526.38,-6712.58 553.88,-6740.08 553.88,-7199.95 728.01,-7374.08 2893.01,-7374.08 3104.01,-7585.08 3434.88,-7585.08 3479.88,-7540.08 DD1_P8.9@3511.38,-7540.08 DD1_P8.9@3513.88,-7540.08
NetDD1_P8_15: DD1_P8.15 U1_P8.1 | length 195.9
  Top Layer w10: v1(3445,-7172) 3445,-7187.46 3465.53,-7207.99 3465.53,-7225.73 3479.88,-7240.08 DD1_P8.15@3511.38,-7240.08
  Bottom Layer w10: v1(3445,-7172) 3451.92,-7165.08 3491.93,-7165.08 U1_P8.1@3516.93,-7165.08
  Bottom Layer w12: U1_P8.1@3491.93,-7165.08 U1_P8.1@3496.93,-7160.08
NetDD2_1: DD2.1 U6.4 | length 1482.3
  Top Layer w8: v1(-20,-5550) -20,-5495 -5,-5480 31.35,-5480 75,-5436.35 U6.4@75,-5417 ; v1(5,-6690) 80.91,-6765.91 DD2.1@111.89,-6765.91
  Bottom Layer w8: v1(-20,-5550) -20,-6665 v1(5,-6690)
NetDD2_2: DD2.2 U6.3 | length 1508.4
  Top Layer w8: v1(-41.81,-5517.1) -41.81,-5496.81 25,-5430 U6.3@25,-5417 ; v1(-20,-6715) 80.91,-6815.91 DD2.2@111.89,-6815.91
  Bottom Layer w8: v1(-41.81,-5517.1) -41.81,-6693.19 v1(-20,-6715)
NetDD2_3: DD2.3 U6.2 | length 1558.4
  Top Layer w8: v1(-65,-5550) -66.81,-5548.19 -66.81,-5482.39 -25,-5440.58 U6.2@-25,-5417 ; v1(-45,-6740) 80.91,-6865.91 DD2.3@111.89,-6865.91
  Bottom Layer w8: v1(-65,-5550) -65,-6720 v1(-45,-6740)
NetDD2_4: DD2.4 U6.1 | length 1610
  Top Layer w8: v1(-90,-5520) -90,-5432 U6.1@-75,-5417 ; v1(-75.26,-6765) 75.65,-6915.91 DD2.4@111.89,-6915.91
  Bottom Layer w8: v1(-90,-5520) -90,-6750.26 v1(-75.26,-6765)
NetDD2_14: DD2.14 DD3.9 | length 560
  Top Layer w10: DD3.9@339.76,-6447.8 401.59,-6447.8 423.88,-6470.08 423.88,-6845.08 403.05,-6865.91 DD2.14@340.87,-6865.91
NetDD2_15: DD2.15 U6.5 | length 1696.1
  Top Layer w8: v1(5,-5515) 20,-5500 50,-5500 125,-5425 U6.5@125,-5417 ; v1(30,-6660) 105,-6735 165,-6735 245.91,-6815.91 DD2.15@340.87,-6815.91
  Bottom Layer w8: v1(5,-5515) 5,-6635 v1(30,-6660)
NetDD3_1: DD3.1 U7.1 | length 223.8
  Top Layer w8: U7.1@85,-5887 85,-6060 110.79,-6085.79 DD3.1@110.79,-6097.8
  Top Layer w20: DD3.1@141.3,-6097.8 DD3.1@142.98,-6096.12
NetDD3_2: DD3.2 U7.2 | length 343.9
  Top Layer w8: DD3.2@110.79,-6147.8 113.78,-6144.81 165.19,-6144.81 186.81,-6123.19 186.81,-5971.81 135,-5920 U7.2@135,-5887
NetDD3_3: DD3.3 U7.3 | length 389.5
  Top Layer w8: DD3.3@110.79,-6197.8 112.99,-6200 165,-6200 200.81,-6164.19 200.81,-5945.81 185,-5930 U7.3@185,-5887
NetDD3_4: DD3.4 U7.4 | length 464.7
  Top Layer w8: DD3.4@110.79,-6247.8 112.99,-6250 195,-6250 215,-6230 215,-5985.2 235,-5965.2 U7.4@235,-5887
NetDD3_5: DD3.5 U7.5 | length 538.3
  Top Layer w8: DD3.5@110.79,-6297.8 112.99,-6300 200,-6300 230,-6270 230,-5990 285,-5935 U7.5@285,-5887
NetDD3_6: DD3.6 U7.6 | length 603.2
  Top Layer w8: DD3.6@110.79,-6347.8 112.99,-6350 190,-6350 246,-6294 246,-5994 335,-5905 U7.6@335,-5887
NetDD3_15: DD3.15 U7.7 | length 384.9
  Top Layer w8: DD3.15@339.76,-6147.8 308.27,-6147.8 260,-6099.53 260,-6000 299.05,-5960.95 334.63,-5960.95 385,-5910.58 U7.7@385,-5887
NetK1_P1_2: K1_P1.2 K2_P1.2 K3_P1.2 K4_P1.2 K5_P1.2 Q2_P1.5 | length 219.6
  Bottom Layer w150: K1_P1.2@2764.41,-886.5 2805.83,-845.08 Q2_P1.5@2966.89,-845.08
NetK1_P1_4: K1_P1.4 U1_P1.12 | length 610.6
  Bottom Layer w15: K1_P1.4@2579.37,-1339.25 2667.72,-1339.25 2730.71,-1276.26 3056.06,-1276.26 3097.25,-1235.08 U1_P1.12@3146.85,-1235.08
NetK1_P2_2: K1_P2.2 K2_P2.2 K3_P2.2 K4_P2.2 K5_P2.2 Q2_P2.5 | length 219.6
  Bottom Layer w150: K1_P2.2@2764.41,-1776.5 2805.83,-1735.08 Q2_P2.5@2966.89,-1735.08
NetK1_P2_4: K1_P2.4 U1_P2.12 | length 610.6
  Bottom Layer w15: K1_P2.4@2579.37,-2229.25 2667.72,-2229.25 2730.71,-2166.26 3056.06,-2166.26 3097.25,-2125.08 U1_P2.12@3146.85,-2125.08
NetK1_P3_2: K1_P3.2 K2_P3.2 K3_P3.2 K4_P3.2 K5_P3.2 Q2_P3.5 | length 219.6
  Bottom Layer w150: K1_P3.2@2764.41,-2666.5 2805.83,-2625.08 Q2_P3.5@2966.89,-2625.08
NetK1_P3_4: K1_P3.4 U1_P3.12 | length 610.6
  Bottom Layer w15: K1_P3.4@2579.37,-3119.25 2667.72,-3119.25 2730.71,-3056.26 3056.06,-3056.26 3097.25,-3015.08 U1_P3.12@3146.85,-3015.08
NetK1_P4_2: K1_P4.2 K2_P4.2 K3_P4.2 K4_P4.2 K5_P4.2 Q2_P4.5 | length 219.6
  Bottom Layer w150: K1_P4.2@2764.41,-3556.5 2805.83,-3515.08 Q2_P4.5@2966.89,-3515.08
NetK1_P4_4: K1_P4.4 U1_P4.12 | length 610.6
  Bottom Layer w15: K1_P4.4@2579.37,-4009.25 2667.72,-4009.25 2730.71,-3946.26 3056.06,-3946.26 3097.25,-3905.08 U1_P4.12@3146.85,-3905.08
NetK1_P5_2: K1_P5.2 K2_P5.2 K3_P5.2 K4_P5.2 K5_P5.2 Q2_P5.5 | length 219.6
  Bottom Layer w150: K1_P5.2@2764.41,-4446.5 2805.83,-4405.08 Q2_P5.5@2966.89,-4405.08
NetK1_P5_4: K1_P5.4 U1_P5.12 | length 610.6
  Bottom Layer w15: K1_P5.4@2579.37,-4899.25 2667.72,-4899.25 2730.71,-4836.26 3056.06,-4836.26 3097.25,-4795.08 U1_P5.12@3146.85,-4795.08
NetK1_P6_2: K1_P6.2 K2_P6.2 K3_P6.2 K4_P6.2 K5_P6.2 Q2_P6.5 | length 219.6
  Bottom Layer w150: K1_P6.2@2764.41,-5336.5 2805.83,-5295.08 Q2_P6.5@2966.89,-5295.08
NetK1_P6_4: K1_P6.4 U1_P6.12 | length 610.6
  Bottom Layer w15: K1_P6.4@2579.37,-5789.25 2667.72,-5789.25 2730.71,-5726.26 3056.06,-5726.26 3097.25,-5685.08 U1_P6.12@3146.85,-5685.08
NetK1_P7_2: K1_P7.2 K2_P7.2 K3_P7.2 K4_P7.2 K5_P7.2 Q2_P7.5 | length 219.6
  Bottom Layer w150: K1_P7.2@2764.41,-6226.5 2805.83,-6185.08 Q2_P7.5@2966.89,-6185.08
NetK1_P7_4: K1_P7.4 U1_P7.12 | length 610.6
  Bottom Layer w15: K1_P7.4@2579.37,-6679.25 2667.72,-6679.25 2730.71,-6616.26 3056.06,-6616.26 3097.25,-6575.08 U1_P7.12@3146.85,-6575.08
NetK1_P8_2: K1_P8.2 K2_P8.2 K3_P8.2 K4_P8.2 K5_P8.2 Q2_P8.5 | length 219.6
  Bottom Layer w150: K1_P8.2@2764.41,-7116.5 2805.83,-7075.08 Q2_P8.5@2966.89,-7075.08
NetK1_P8_4: K1_P8.4 U1_P8.12 | length 610.6
  Bottom Layer w15: K1_P8.4@2579.37,-7569.25 2667.72,-7569.25 2730.71,-7506.26 3056.06,-7506.26 3097.25,-7465.08 U1_P8.12@3146.85,-7465.08
NetK2_P1_4: K2_P1.4 U1_P1.13 | length 966.3
  Bottom Layer w15: K2_P1.4@2244.37,-1339.25 2310.72,-1272.91 2694.06,-1272.91 2716.89,-1250.08 3046.89,-1250.08 3111.89,-1185.08 U1_P1.13@3146.85,-1185.08
NetK2_P2_4: K2_P2.4 U1_P2.13 | length 966.3
  Bottom Layer w15: K2_P2.4@2244.37,-2229.25 2310.72,-2162.91 2694.06,-2162.91 2716.89,-2140.08 3046.89,-2140.08 3111.89,-2075.08 U1_P2.13@3146.85,-2075.08
NetK2_P3_4: K2_P3.4 U1_P3.13 | length 966.3
  Bottom Layer w15: K2_P3.4@2244.37,-3119.25 2310.72,-3052.91 2694.06,-3052.91 2716.89,-3030.08 3046.89,-3030.08 3111.89,-2965.08 U1_P3.13@3146.85,-2965.08
NetK2_P4_4: K2_P4.4 U1_P4.13 | length 966.3
  Bottom Layer w15: K2_P4.4@2244.37,-4009.25 2310.72,-3942.91 2694.06,-3942.91 2716.89,-3920.08 3046.89,-3920.08 3111.89,-3855.08 U1_P4.13@3146.85,-3855.08
NetK2_P5_4: K2_P5.4 U1_P5.13 | length 966.3
  Bottom Layer w15: K2_P5.4@2244.37,-4899.25 2310.72,-4832.91 2694.06,-4832.91 2716.89,-4810.08 3046.89,-4810.08 3111.89,-4745.08 U1_P5.13@3146.85,-4745.08
NetK2_P6_4: K2_P6.4 U1_P6.13 | length 966.3
  Bottom Layer w15: K2_P6.4@2244.37,-5789.25 2310.72,-5722.91 2694.06,-5722.91 2716.89,-5700.08 3046.89,-5700.08 3111.89,-5635.08 U1_P6.13@3146.85,-5635.08
NetK2_P7_4: K2_P7.4 U1_P7.13 | length 966.3
  Bottom Layer w15: K2_P7.4@2244.37,-6679.25 2310.72,-6612.91 2694.06,-6612.91 2716.89,-6590.08 3046.89,-6590.08 3111.89,-6525.08 U1_P7.13@3146.85,-6525.08
NetK2_P8_4: K2_P8.4 U1_P8.13 | length 966.3
  Bottom Layer w15: K2_P8.4@2244.37,-7569.25 2310.72,-7502.91 2694.06,-7502.91 2716.89,-7480.08 3046.89,-7480.08 3111.89,-7415.08 U1_P8.13@3146.85,-7415.08
NetK3_P1_4: K3_P1.4 U1_P1.14 | length 1322.1
  Bottom Layer w15: K3_P1.4@1909.37,-1339.25 1987.72,-1339.25 2075.06,-1251.91 2675.06,-1251.91 2701.89,-1225.08 3028.78,-1225.08 3118.78,-1135.08 U1_P1.14@3146.85,-1135.08
NetK3_P2_4: K3_P2.4 U1_P2.14 | length 1322.1
  Bottom Layer w15: K3_P2.4@1909.37,-2229.25 1987.72,-2229.25 2075.06,-2141.91 2675.06,-2141.91 2701.89,-2115.08 3028.78,-2115.08 3118.78,-2025.08 U1_P2.14@3146.85,-2025.08
NetK3_P3_4: K3_P3.4 U1_P3.14 | length 1322.1
  Bottom Layer w15: K3_P3.4@1909.37,-3119.25 1987.72,-3119.25 2075.06,-3031.91 2675.06,-3031.91 2701.89,-3005.08 3028.78,-3005.08 3118.78,-2915.08 U1_P3.14@3146.85,-2915.08
NetK3_P4_4: K3_P4.4 U1_P4.14 | length 1322.1
  Bottom Layer w15: K3_P4.4@1909.37,-4009.25 1987.72,-4009.25 2075.06,-3921.91 2675.06,-3921.91 2701.89,-3895.08 3028.78,-3895.08 3118.78,-3805.08 U1_P4.14@3146.85,-3805.08
NetK3_P5_4: K3_P5.4 U1_P5.14 | length 1322.1
  Bottom Layer w15: K3_P5.4@1909.37,-4899.25 1987.72,-4899.25 2075.06,-4811.91 2675.06,-4811.91 2701.89,-4785.08 3028.78,-4785.08 3118.78,-4695.08 U1_P5.14@3146.85,-4695.08
NetK3_P6_4: K3_P6.4 U1_P6.14 | length 1322.1
  Bottom Layer w15: K3_P6.4@1909.37,-5789.25 1987.72,-5789.25 2075.06,-5701.91 2675.06,-5701.91 2701.89,-5675.08 3028.78,-5675.08 3118.78,-5585.08 U1_P6.14@3146.85,-5585.08
NetK3_P7_4: K3_P7.4 U1_P7.14 | length 1322.1
  Bottom Layer w15: K3_P7.4@1909.37,-6679.25 1987.72,-6679.25 2075.06,-6591.91 2675.06,-6591.91 2701.89,-6565.08 3028.78,-6565.08 3118.78,-6475.08 U1_P7.14@3146.85,-6475.08
NetK3_P8_4: K3_P8.4 U1_P8.14 | length 1322.1
  Bottom Layer w15: K3_P8.4@1909.37,-7569.25 1987.72,-7569.25 2075.06,-7481.91 2675.06,-7481.91 2701.89,-7455.08 3028.78,-7455.08 3118.78,-7365.08 U1_P8.14@3146.85,-7365.08
NetK4_P1_1: K4_P1.1 U1_P1.16 | length 1862.4
  Bottom Layer w15: K4_P1.1@1424.41,-1339.25 1457.72,-1339.25 1521.89,-1275.08 1826.89,-1275.08 1901.06,-1200.91 2656.06,-1200.91 2681.89,-1175.08 3006.89,-1175.08 3061.89,-1120.08 3061.89,-1096.23 3123.04,-1035.08 U1_P1.16@3146.85,-1035.08
NetK4_P2_1: K4_P2.1 U1_P2.16 | length 1862.4
  Bottom Layer w15: K4_P2.1@1424.41,-2229.25 1457.72,-2229.25 1521.89,-2165.08 1826.89,-2165.08 1901.06,-2090.91 2656.06,-2090.91 2681.89,-2065.08 3006.89,-2065.08 3061.89,-2010.08 3061.89,-1986.23 3123.04,-1925.08 U1_P2.16@3146.85,-1925.08
NetK4_P3_1: K4_P3.1 U1_P3.16 | length 1862.4
  Bottom Layer w15: K4_P3.1@1424.41,-3119.25 1457.72,-3119.25 1521.89,-3055.08 1826.89,-3055.08 1901.06,-2980.91 2656.06,-2980.91 2681.89,-2955.08 3006.89,-2955.08 3061.89,-2900.08 3061.89,-2876.23 3123.04,-2815.08 U1_P3.16@3146.85,-2815.08
NetK4_P4_1: K4_P4.1 U1_P4.16 | length 1862.4
  Bottom Layer w15: K4_P4.1@1424.41,-4009.25 1457.72,-4009.25 1521.89,-3945.08 1826.89,-3945.08 1901.06,-3870.91 2656.06,-3870.91 2681.89,-3845.08 3006.89,-3845.08 3061.89,-3790.08 3061.89,-3766.23 3123.04,-3705.08 U1_P4.16@3146.85,-3705.08
NetK4_P5_1: K4_P5.1 U1_P5.16 | length 1862.4
  Bottom Layer w15: K4_P5.1@1424.41,-4899.25 1457.72,-4899.25 1521.89,-4835.08 1826.89,-4835.08 1901.06,-4760.91 2656.06,-4760.91 2681.89,-4735.08 3006.89,-4735.08 3061.89,-4680.08 3061.89,-4656.23 3123.04,-4595.08 U1_P5.16@3146.85,-4595.08